# Altium PCB MCB.PcbDoc
Units mm, origin at the board's own origin, x right, y up, seen from the top; angles counter-clockwise.
Board outline 27.45 x 20.12 mm, 2 copper layers (Top Layer, Bottom Layer); 39 components, 48 nets, 197 pads, 48 vias.
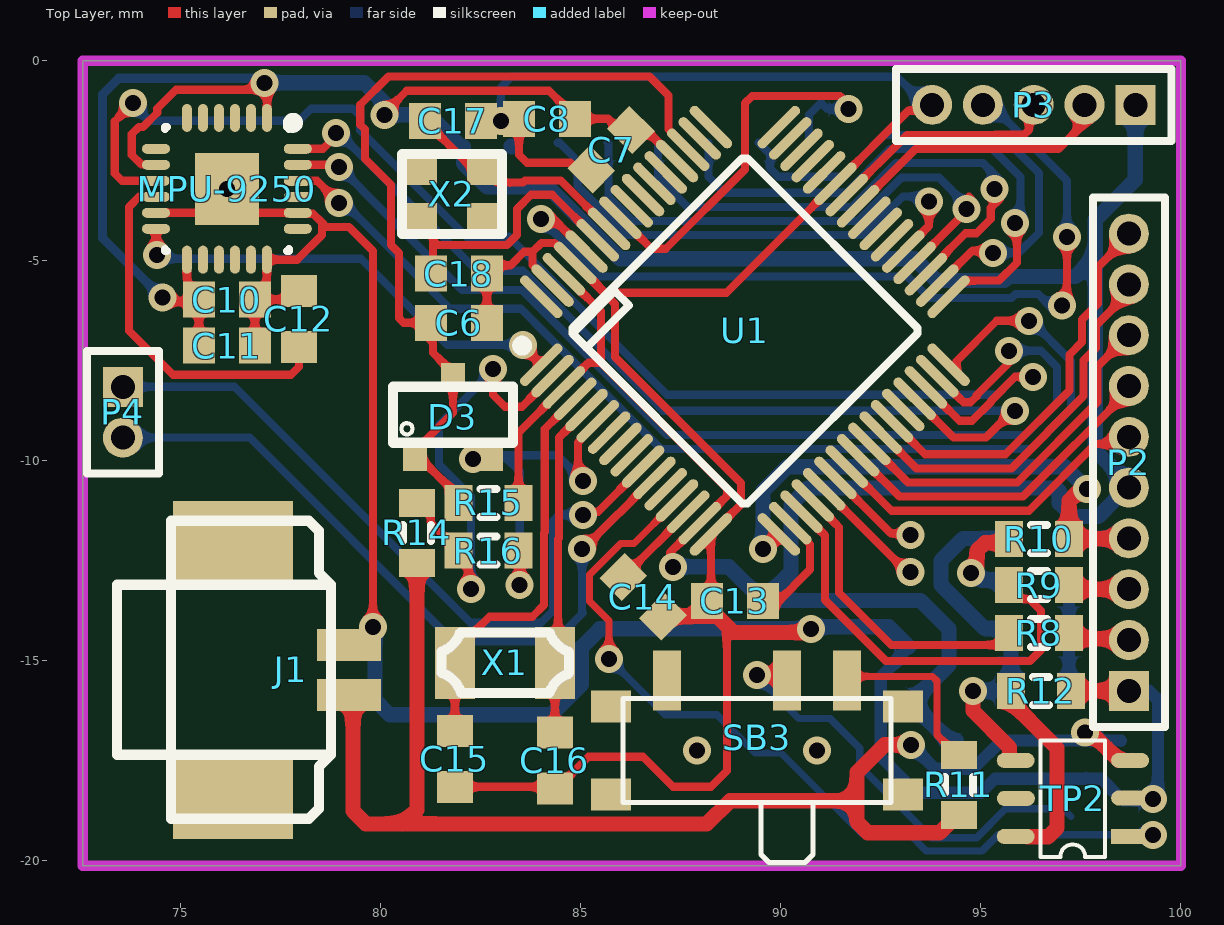
[diagram p0: Top Layer view]
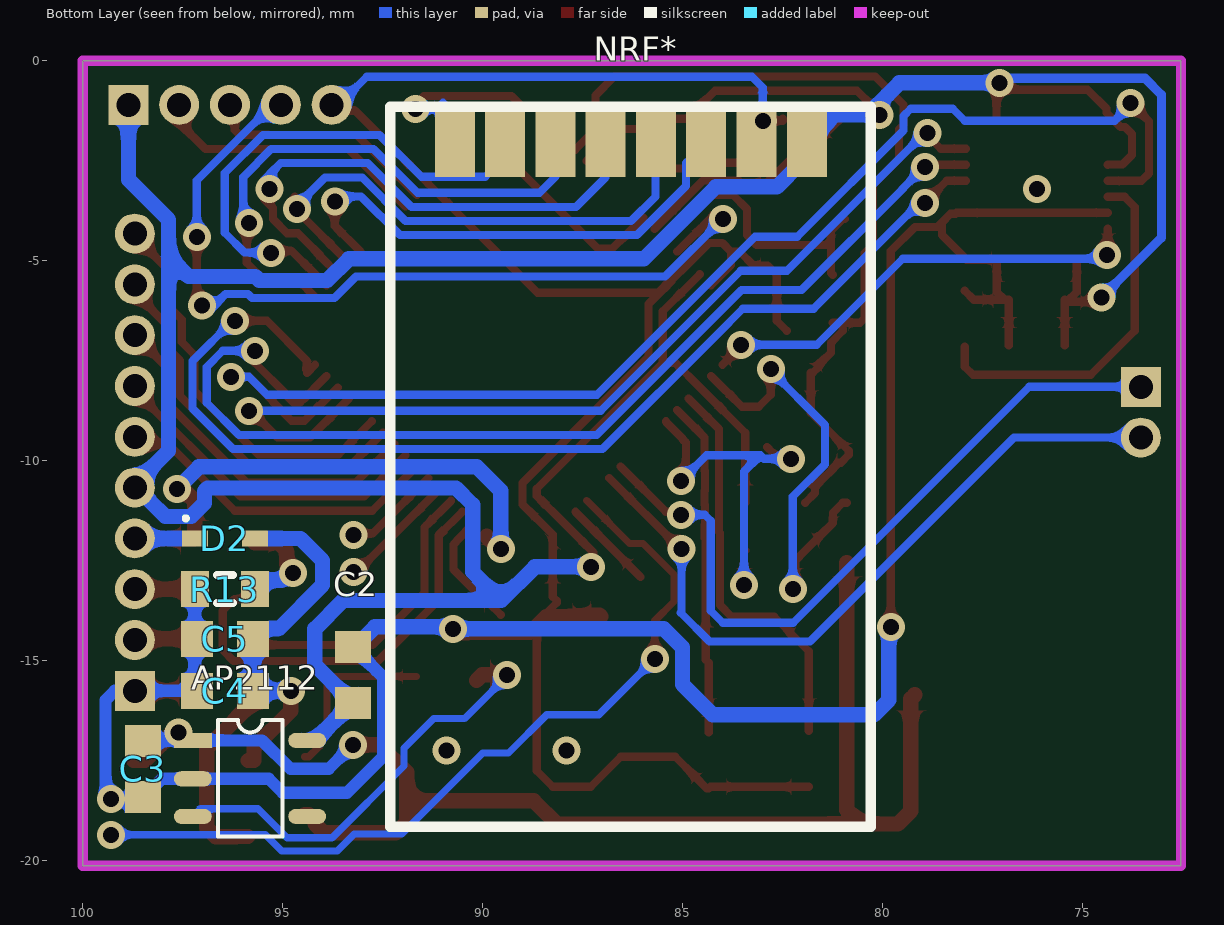
[diagram p1: Bottom Layer view, seen from below]

## Layer stack, top to bottom
Top Solder: solder mask 0.0102, Solder Resist, Dk 3.5
Top Layer: signal copper 0.0356
Dielectric 1: dielectric 0.32, FR-4, Dk 4.8
Bottom Layer: signal copper 0.0356
Bottom Solder: solder mask 0.0102, Solder Resist, Dk 3.5

## Board outline
72.547,-20.122 72.547,0 100,0 100,-20.122

## Design rules (kind name [scope] priority, off if disabled: settings)
Clearance [All] p1: gap=0.15 ignorepadtopadclearanceinfootprint=FALSE
ComponentClearance [All] p1: gap=0.178 collisioncheckmode=3 verticalgap=0 showdistances=FALSE
PolygonConnect [All] p1: connectstyle=Relief reliefconductorwidth=0.254 reliefentries=4 polygonreliefangle="90 Angle" airgapwidth=0.254
RoutingVias [All] p1: holewidth=0.711 width=1.27 viastyle="Through Hole" minholewidth=0.4 minwidth=0.6 maxholewidth=0.711 maxwidth=1.27
SolderMaskExpansion [All] p1: expansion=0.102
Width [All] p1: maxlimit=1.016 minlimit=0.178 preferedwidth=0.508
29 further rules are at their usual default settings.

## Components (designator, comment, footprint, x,y, rotation, side; value= is the part's Value field where it differs from the comment)
AP2112 "AP2112" SOT-23-5 96.62,-16.48 r180 bottom
C2 "Cap Semi" 1608[0603] 93.25,-15.35 r270 bottom value=100pF
C3 "Cap Semi" 1608[0603] 98.5,-17.7 r90 bottom value=100pF
C4 "Cap Semi" 1608[0603] 96.45,-15.75 r180 bottom value=100pF
C5 "Cap Semi" 1608[0603] 96.45,-14.45 r180 bottom value=100pF
C6 "Cap Semi" 1608[0603] 81.95,-6.549 r180 top value=100pF
C7 "Cap Semi" 1608[0603] 85.755,-2.225 r45 top value=100pF
C8 "Cap Semi" 1608[0603] 84.15,-1.45 r0 top value=100pF
C10 "Cap Semi" 1608[0603] 76.15,-5.973 r180 top value=100pF
C11 "Cap Semi" 1608[0603] 76.15,-7.122 r180 top value=100pF
C12 "Cap Semi" 1608[0603] 77.95,-6.45 r270 top value=100pF
C13 "Cap Semi" 1608[0603] 88.85,-13.5 r0 top value=100pF
C14 "Cap Semi" 1608[0603] 86.554,-13.4 r135 top value=100pF
C15 "Cap Semi" 1608[0603] 81.85,-17.45 r270 top value=100pF
C16 "Cap Semi" 1608[0603] 84.35,-17.49 r270 top value=100pF
C17 "Cap Semi" 1608[0603] 81.8,-1.5 r0 top value=100pF
C18 "Cap Semi" 1608[0603] 81.95,-5.323 r0 top value=100pF
D2 "Schottky" SOD-523 96.45,-11.94 r180 bottom
D3 "Vref" SOT-23 81.8,-7.9 r0 top
J1 "Plug2" Terminal_block_2pin_1.25mm_SMD 76.3,-15.2 r90 top
MPU-9250 "24Pin" QFN_24PIN 76.15,-3.2 r270 top
NRF* "NRF24L01" NRF24L01_Module_SMD 80.3,-19.15 r0 bottom
P2 "MHDR1X10" MHDR1X10 98.7,-15.75 r90 top
P3 "MHDR1X5" MHDR1X5 98.86,-1.1 r180 top
P4 "MHDR1X2" MHDR1X2 73.55,-8.15 r270 top
R8 "Res3" J1-0603 96.45,-14.3 r0 top value=1K
R9 "Res3" J1-0603 96.45,-13.11 r0 top value=1K
R10 "Res3" J1-0603 96.45,-11.95 r0 top value=1K
R11 "Res3" J1-0603 94.45,-18.1 r90 top value=1K
R12 "Res3" J1-0603 96.5,-15.75 r180 top value=1K
R13 "Res3" J1-0603 96.45,-13.21 r180 bottom value=1K
R14 "Res3" J1-0603 80.9,-11.8 r270 top value=1K
R15 "Res3" J1-0603 82.689,-11.05 r0 top value=1K
R16 "Res3" J1-0603 82.689,-12.245 r180 top value=1K
SB3 "SPDT" SS-SK-02P 89.35,-17.25 r0 top
TP2 "TP-4057" SOT-23-6 98.1,-19.9 r180 top
U1 "NUC240SE3AE" MCU_LQFP_64_7x7 89.1,-6.75 r45 top
X1 "Xtal" FC-135 82.76,-16.75 r0 top value=32.768k
X2 "Xtal" 2520S 82.6,-3.952 r180 top value=12M

## Footprints (in the part's own frame and the unit in brackets; to place one, negate y for a bottom-side part, rotate by r counter-clockwise, add the part's x,y. Pads: shape width x height; smd on the part's side, far side on the other; paste and mask are expansions set on the pad)
1608[0603] [mm] "Chip Capacitor, Body 1.6x0.8mm, IPC High Density"
  rect 0.8x0.9 smd: 1(-0.7,0) 2(0.7,0)
  body extent -0.87,-0.48 0.87,0.48, height 1.3
2520S [mm]
  rect 0.9x0.8 smd: 1(0,-1.25) 2(1.65,0) ""(0,0) ""(1.65,-1.25)
  silkscreen extent -0.43,-1.63 2.07,0.37
FC-135 [mm]
  rect 1x1.8 smd: 1(-0.91,1.7) 2(1.59,1.7)
  silkscreen extent -1.24,0.94 1.94,2.46
J1-0603 [mm] "Chip Resistor, Body 1.6x0.8mm, IPC High Density"
  rect 0.7x0.9 smd: 1(-0.75,0) 2(0.75,0)
  silkscreen extent -0.2,-0.35 0.2,0.35, body extent -0.85,-0.48 0.85,0.48, height 0.9
MCU_LQFP_64_7x7 [mm]
  oval 1.4x0.25 smd: 1(-4.2,3) 2(-4.2,2.6) 3(-4.2,2.2) 4(-4.2,1.8) 5(-4.2,1.4) 6(-4.2,1) 7(-4.2,0.6) 8(-4.2,0.2) 9(-4.2,-0.2) 10(-4.2,-0.6) 11(-4.2,-1) 12(-4.2,-1.4) 13(-4.2,-1.8) 14(-4.2,-2.2) 15(-4.2,-2.6) 16(-4.2,-3) 33(4.2,-3) 34(4.2,-2.6) 35(4.2,-2.2) 36(4.2,-1.8) 37(4.2,-1.4) 38(4.2,-1) 39(4.2,-0.6) 40(4.2,-0.2) 41(4.2,0.2) 42(4.2,0.6) 43(4.2,1) 44(4.2,1.4) 45(4.2,1.8) 46(4.2,2.2) 47(4.2,2.6) 48(4.2,3)
  oval 0.25x1.4 smd: 17(-3,-4.2) 18(-2.6,-4.2) 19(-2.2,-4.2) 20(-1.8,-4.2) 21(-1.4,-4.2) 22(-1,-4.2) 23(-0.6,-4.2) 24(-0.2,-4.2) 25(0.2,-4.2) 26(0.6,-4.2) 27(1,-4.2) 28(1.4,-4.2) 29(1.8,-4.2) 30(2.2,-4.2) 31(2.6,-4.2) 32(3,-4.2) 49(3,4.2) 50(2.6,4.2) 51(2.2,4.2) 52(1.8,4.2) 53(1.4,4.2) 54(1,4.2) 55(0.6,4.2) 56(0.2,4.2) 57(-0.2,4.2) 58(-0.6,4.2) 59(-1,4.2) 60(-1.4,4.2) 61(-1.8,4.2) 62(-2.2,4.2) 63(-2.6,4.2) 64(-3,4.2)
  silkscreen extent -4.32,-3.1 3.1,3.8, body extent -3.5,-3.5 3.5,3.5, height 1.6
MHDR1X2 [mm] "Connector; Header; 2 Position"
  rect 1x1 hole 0.6: 1(0,0)
  round 1 hole 0.6: 2(1.27,0)
  silkscreen extent -0.9,-0.9 2.17,0.9
MHDR1X5 [mm] "Connector; Header; 5 Position"
  rect 1x1 hole 0.6: 1(0,0)
  round 1 hole 0.6: 2(1.27,0) 3(2.54,0) 4(3.81,0) 5(5.08,0)
  silkscreen extent -0.9,-0.9 5.98,0.9
MHDR1X10 [mm] "Connector; Header; 10 Position"
  rect 1x1 hole 0.6: 1(0,0)
  round 1 hole 0.6: 2(1.27,0) 3(2.54,0) 4(3.81,0) 5(5.08,0) 6(6.35,0) 7(7.62,0) 8(8.89,0) 9(10.16,0) 10(11.43,0)
  silkscreen extent -0.9,-0.9 12.33,0.9
NRF24L01_Module_SMD [mm]
  rect 1x1.7 smd: 1(1.6,-17.1) 2(2.857,-17.1) 3(4.114,-17.1) 4(5.371,-17.1) 5(6.629,-17.1) 6(7.886,-17.1) 7(9.143,-17.1) 8(10.4,-17.1)
  silkscreen extent 0,-18 12.02,0
QFN_24PIN [mm]
  oval 0.7x0.249 smd: 1(-1.772,1) 2(-1.772,0.6) 3(-1.772,0.2) 4(-1.772,-0.2) 5(-1.772,-0.6) 6(-1.772,-1) 13(1.772,-1) 14(1.772,-0.6) 15(1.772,-0.2) 16(1.772,0.2) 17(1.772,0.6) 18(1.772,1)
  oval 0.249x0.7 smd: 7(-1,-1.772) 8(-0.6,-1.772) 9(-0.2,-1.772) 10(0.2,-1.772) 11(0.6,-1.772) 12(1,-1.772) 19(1,1.772) 20(0.6,1.772) 21(0.2,1.772) 22(-0.2,1.772) 23(-0.6,1.772) 24(-1,1.772)
  rect 1.8x1.6 smd: 25(0,0)
  silkscreen extent -1.77,-1.55 1.55,1.78, body extent -1.55,-1.55 1.55,1.55, height 1
SOD-523 [mm] "SODFL, 2-Leads, Body 0.80x1.60mm, IPC Medium Density"
  rect 0.65x0.4 smd: 1(-0.75,0) 2(0.75,0)
  silkscreen extent -1.03,0.45 -0.93,0.55, body extent -0.65,-0.45 0.65,0.45, height 0.65
SOT-23 [mm]
  rect 0.6x0.7 smd: 1(-0.95,-2) 2(0,0) 3(0.95,-2)
  silkscreen extent -1.5,-1.65 1.5,-0.25
SOT-23-5 [mm]
  rect 0.95x0.38 smd: 1(-0.63,-0.51)
  oval 0.95x0.38 smd: 2(-0.63,-1.47) 3(-0.63,-2.41) 4(2.23,-2.41) 5(2.23,-0.51)
  silkscreen extent 0,-2.91 1.61,0
SOT-23-6 [mm]
  rect 0.95x0.38 smd: 1(-0.63,-0.51)
  oval 0.95x0.38 smd: 2(-0.63,-1.47) 3(-0.63,-2.41) 4(2.23,-2.41) 5(2.227,-1.461) 6(2.23,-0.51)
  silkscreen extent 0,-2.91 1.61,0
SS-SK-02P [mm]
  rect 0.7x1.5 smd: 1(-2.195,1.76) 2(0.805,1.76) 3(2.305,1.76)
  rect 1x0.8 smd: ""(-3.595,-1.09) ""(-3.595,1.11) ""(3.705,-1.09) ""(3.705,1.11)
  silkscreen extent -3.29,-2.79 3.41,1.31
Terminal_block_2pin_1.25mm_SMD [mm]
  rect 0.8x1.6 smd: 1(-0.65,-2.9) 2(0.6,-2.9)
  rect 2.1x3 smd: ""(-3.2,0) ""(3.15,0)
  silkscreen extent -3.75,-2.45 3.7,2.9

## Part data
C2 C3 C4 C5 C6 C7 C8 C10 C11 C12 C13 C14 C15 C16 C17 C18: "Capacitor (Semiconductor SIM Model)", LatestRevisionDate=29-May-2009, LatestRevisionNote="IPC-7351 Footprint Added.", PackageDescription="Chip Capacitor", PackageReference=C1206, Published=8-Jun-2000, Publisher="Altium Limited"
D2: library part Diode2
MPU-9250: library part MPU-9250_2
NRF*: library part NRF24L01_module
P2: "Header, 10-Pin", LatestRevisionDate=17-Jul-2002, LatestRevisionNote="Re-released for DXP Platform.", Publisher="Altium Limited"
P3: "Header, 5-Pin", LatestRevisionDate=17-Jul-2002, LatestRevisionNote="Re-released for DXP Platform.", Publisher="Altium Limited"
P4: "Header, 2-Pin", LatestRevisionDate=17-Jul-2002, LatestRevisionNote="Re-released for DXP Platform.", Publisher="Altium Limited"
R8 R9 R10 R11 R12 R13 R14 R15 R16: "Resistor", LatestRevisionDate=29-May-2009, LatestRevisionNote="IPC-7351 Footprint Added.", PackageDescription="Chip Resistor", PackageReference=J1-0603, Published=8-Jun-2000, Publisher="Altium Limited"
SB3: library part Switch_Button2
U1: OriginalSymbolOrigin=(0,0)

## Via types
v1: diameter 0.7, hole 0.4, Top Layer to Bottom Layer, 47 vias
v2: diameter 0.7, hole 0.4, Top Layer to Bottom Layer, tented top, 1 vias

## Nets (pads, with @x,y where several pads share a name; then routed paths per layer and width w, separated by ;. In a path a pad name is that pad's centre, name@x,y a point inside that pad or via, vN(x,y) a via of type N, cw(c..) or ccw(c..) an arc to the next point about the centre after c; other vN are vias at no path point)
ADC_ONOFF: D3.3 R16.1 U1.6 | length 9.8
  Top Layer w0.203: v1(82.3,-9.95) 82.6,-9.95 82.75,-9.8 D3.3@82.899,-9.651 ; R16.1 83.471,-12.277 v1(83.471,-13.1) ; v1(85.05,-10.5) 85.05,-10.393 84.923,-10.265 84.923,-9.546 84.993,-9.476 84.993,-9.455 85.423,-9.025 U1.6
  Bottom Layer w0.203: v1(82.3,-9.95) 82.973,-9.95 83.061,-9.861 ; v1(83.471,-13.1) 83.471,-10.271 83.061,-9.861 ; v1(85.05,-10.5) 84.411,-9.861 83.061,-9.861
AVDD: AP2112.5 C2.2 C7.2 C8.2 C10.2 C11.2 MPU-9250.1 MPU-9250.8 MPU-9250.13 NRF*.1 P2.5 P3.1 R15.2 U1.3 U1.15 U1.52 U1.62 | length 98.7
  Top Layer w0.203: MPU-9250.8 74.369,-2.591 74.011,-2.591 73.771,-2.351 73.771,-1.83 73.949,-1.652 74.057,-1.652 74.409,-1.299 74.409,-1.192 74.878,-0.723 77.2,-0.723 77.159,-0.764 77.159,-1.419 MPU-9250.1 ; v1@74.65,-6.023 C10.2@75.392,-6.023 ; MPU-9250.13 75.15,-5.78 C10.2@75.392,-6.023 ; C11.2 C10.2@75.45,-6.08 ; C10.2 C10.2@75.45,-6.08 ; v1@80.2,-1.449 80.2,-1.194 80.646,-0.748 84.198,-0.748 84.85,-1.4 C8.2 85.677,-1.45 85.932,-1.705 86.601,-1.705 U1.52 ; R15.2 83.439,-9.3 U1.3 85.189,-7.55 85.5,-7.55 ; U1.62 85.5,-6.261 85.5,-7.55 ; v1(87.3,-12.65) 87.231,-12.581 87.231,-12.296 U1.15 88.65,-10.877 88.65,-10.7 85.5,-7.55 ; C10.2@75.392,-6.023 C10.2@75.45,-6.08
  Bottom Layer w0.229: v1(74.536,-5.923) 73.036,-4.423 73.036,-0.846 73.446,-0.436 76.971,-0.436 v1(77.086,-0.55)
  Bottom Layer w0.381: v1(77.086,-0.55) 79.586,-0.55 80.136,-1.1 80.086,-1.15 v1(80.086,-1.349) 81.199,-1.349 NRF*.1 ; NRF*.1@82.014,-2.15 82.064,-2.15 82.064,-2.564 82.65,-3.15 84.176,-3.15 85.976,-4.95 93.35,-4.95 93.89,-5.49 95.586,-5.49 95.686,-5.39 97.36,-5.39 97.859,-4.891 ; v1(87.3,-12.65) 88.7,-12.65 89.541,-13.491 ; C2.2 C2.2@93.3,-16.05 ; AP2112.5 94.106,-16.99 94.106,-16.906 93.509,-16.31 93.509,-16.26 C2.2@93.3,-16.05 ; P3.1 98.86,-2.971 97.859,-3.972 97.859,-4.891 ; 89.541,-13.491 90.252,-12.78 90.252,-11.098 90.669,-10.681 96.88,-10.681 96.959,-10.76 96.959,-11.059 97.29,-11.39 97.936,-11.39 98.34,-10.986 98.34,-10.973 98.644,-10.67 P2.5 98.7,-10.589 97.859,-9.748 97.859,-4.891 ; 89.541,-13.491 93.49,-13.491 94.2,-14.201 94.2,-15.1 93.509,-15.79 93.509,-15.84 C2.2@93.3,-16.05
BAT_ADC: R14.1 R16.2 U1.2 | length 11.8
  Top Layer w0.203: R14.1 81,-11.05 81.248,-11.298 81.248,-11.554 R16.2 82.187,-12.493 82.187,-13.147 v1(82.25,-13.21) ; v1(82.8,-7.7) 82.8,-8.35 83.1,-8.65 83.523,-8.65 U1.2
  Bottom Layer w0.203: v1(82.25,-13.21) 82.25,-10.891 81.448,-10.09 81.448,-9.102 82.85,-7.7 v1(82.8,-7.7)
button: P2.10 U1.27 | length 10
  Top Layer w0.203: U1.27 93.6,-9.836 95.615,-9.836 97.212,-8.238 97.212,-7.349 97.527,-7.034 97.527,-6.471 97.929,-6.068 97.929,-5.157 98.7,-4.387 P2.10
CHRG: TP2.1 U1.13 | length 21
  Top Layer w0.178: v1(85.7,-14.95) 85.7,-14 85.22,-13.52 85.22,-12.841 85.996,-12.065 86.331,-12.065 U1.13
  Bottom Layer w0.178: v1(85.7,-14.95) 87.1,-16.35 88.4,-16.35 89.359,-17.309 90,-17.309 92.025,-19.334 93.213,-19.334 93.63,-19.751 95.032,-19.751 95.432,-19.35 v1(99.3,-19.35)
D12I: C18.1 U1.59 X2.2 | length 7.1
  Top Layer w0.203: X2.2 81,-3.952 81.298,-4.25 81.298,-4.484 ; C18.1@81.25,-5.35 81.298,-5.302 81.298,-4.484 ; U1.59 84.284,-3.348 83.751,-3.348 83.398,-3.701 83.398,-4.359 83.154,-4.603 81.417,-4.603 81.298,-4.484
D12O: C17.1 U1.58 X2.1 | length 6.1
  Top Layer w0.203: C17.1 82.252,-2.652 82.252,-2.403 82.895,-3.047 83.553,-3.047 83.604,-2.995 84.497,-2.995 U1.58
D+: R8.1 U1.20 | length 7.5
  Top Layer w0.203: U1.20 90.797,-11.005 91.453,-11.661 91.453,-13.299 92.758,-14.603 95.397,-14.603 R8.1
D-: R9.1 U1.19 | length 10.7
  Top Layer w0.203: U1.19 91.1,-11.861 91.1,-13.479 92.622,-15.002 96.229,-15.002 96.5,-14.731 96.5,-13.75 96.208,-13.458 95.948,-13.458 95.7,-13.21 R9.1
DVBUS: D2.1 P2.4 R10.2 U1.17 | length 15.1
  Top Layer w0.381: v1(89.55,-12.2) 89.684,-12.2 89.692,-12.208 89.692,-12.098 U1.17@89.902,-11.887 ; v1(97.65,-10.7) 97.5,-10.7 97.2,-11 R10.2 98.69,-11.95 P2.4
  Bottom Layer w0.381: v1(89.55,-12.2) 89.55,-10.75 90.15,-10.15 97.1,-10.15 v1(97.65,-10.7) ; D2.1 P2.4
GND: AP2112.2 C2.1 C3.1 C4.1 C5.1 C6.1 C7.1 C8.1 C10.1 C11.1 C12.1 C13.1 C14.1 C15.2 C16.2 C17.2 C18.2 J1.2 MPU-9250.11 MPU-9250.18 MPU-9250.20 NRF*.2 P2.1 P3.5 R12.1 R13.1 TP2.2 U1.16 U1.43 U1.61 U1.63 | length 115.6
  Top Layer w0.203: MPU-9250.11 MPU-9250.20 78.16,-3.8 78.184,-3.824 78.304,-3.824 78.524,-4.044 ; C11.1 C10.1 C10.1@76.958,-5.973 ; C12.1 77.727,-5.973 C10.1@76.958,-5.973 ; v1(79.8,-14.15) 79.8,-4.753 79.199,-4.152 78.631,-4.152 78.524,-4.044 ; C15.2 84.311,-18.15 C16.2 84.4,-18.19 84.698,-17.891 85.189,-17.4 86.55,-17.4 87.3,-18.15 88.25,-18.15 88.65,-17.75 88.65,-14.131 ; C6.1@82.4,-6.75 82.65,-6.5 C18.2@82.65,-5.35 ; C17.2@82.5,-1.45 C17.2 83.4,-1.5 C8.1 83.45,-2.35 83.65,-2.55 84.738,-2.55 84.883,-2.695 C7.1@85.305,-2.695 ; C18.2 C18.2@82.65,-5.35 ; U1.63 84.292,-5.606 83.791,-5.106 83.791,-4.773 ; 88.5,-13.981 88.5,-13.9 88.15,-13.55 C13.1 88.251,-13.399 U1.16 89.003,-11.089 89.003,-10.554 85.853,-7.404 85.853,-6.082 85.287,-5.516 85.287,-5.496 84.857,-5.066 U1.61 ; P3.5 93.636,-1.244 93.192,-1.244 U1.43 88.636,-5.8 85.617,-5.8 84.87,-5.053 U1.61 ; C10.1@76.958,-5.973 77.15,-5.78 MPU-9250.18 77.907,-4.973 78.524,-4.356 78.524,-4.044 ; C18.2@82.65,-5.35 82.886,-5.114 83.236,-5.114 83.577,-4.773 83.791,-4.773 ; 83.791,-4.773 84.012,-4.553 84.344,-4.553 84.845,-5.053 U1.61
  Top Layer w0.381: C14.1 87.085,-13.86 87.381,-13.86 87.416,-13.895 88.414,-13.895 88.5,-13.981 88.65,-14.131 88.811,-14.292 90.584,-14.292 v1@90.713,-14.163 ; R12.1 P2.1
  Top Layer w0.508: v1@90.713,-14.163 v1(90.75,-14.2)
  Bottom Layer w0.203: v1(83,-1.5) 83,-0.671 83.271,-0.4 92.9,-0.4 93.6,-1.1 P3.5
  Bottom Layer w0.305: C2.1@93.2,-14.65 92.952,-14.898 92.952,-14.948 92.498,-15.402 92.498,-17.4 93.397,-18.3 94.999,-18.3 95.349,-17.95 AP2112.2 98.017,-17.95 98.241,-18.173 98.241,-18.19 98.45,-18.4 C3.1 ; R13.1 97.2,-15.4 97.55,-15.75 P2.1 99.2,-15.75 99.429,-15.979 99.429,-18.322 v1(99.3,-18.45) 99.258,-18.492 C3.1@98.558,-18.492
  Bottom Layer w0.381: v1(79.8,-14.15) 79.85,-14.2 79.85,-15.979 80.221,-16.35 84.25,-16.35 85.009,-15.591 85.009,-14.664 85.473,-14.2 v1(90.75,-14.2) 90.8,-14.15 92.7,-14.15 C2.1@93.2,-14.65 ; NRF*.2@83.25,-2.129 NRF*.2@83.271,-2.15
ICE_CLK: P3.3 U1.42 | length 5.9
  Top Layer w0.203: U1.42 93.15,-1.852 95.361,-1.852 95.363,-1.85 96.081,-1.85 96.2,-1.731 96.2,-1.22 P3.3
ICE_DAT: P3.2 U1.41 | length 7
  Top Layer w0.203: U1.41 93.362,-2.205 96.937,-2.205 97.59,-1.552 P3.2
LED1: P2.6 U1.23 | length 8.3
  Top Layer w0.203: U1.23 91.658,-10.144 92.763,-11.248 96.2,-11.248 97.864,-9.584 98.516,-9.584 P2.6
LED2: P2.7 U1.24 | length 8.4
  Top Layer w0.203: U1.24 92.962,-10.895 96.054,-10.895 98.7,-8.249 P2.7
LED3: P2.8 U1.25 | length 8.9
  Top Layer w0.203: U1.25 93.175,-10.542 95.908,-10.542 97.919,-8.531 97.919,-7.641 P2.8
LED4: P2.9 U1.26 | length 9.5
  Top Layer w0.203: U1.26 93.387,-10.189 95.761,-10.189 97.566,-8.384 97.566,-7.495 97.88,-7.18 97.88,-6.617 98.7,-5.797 P2.9
MPU_INT: MPU-9250.12 U1.1 | length 11.9
  Top Layer w0.203: MPU-9250.12 74.378,-4.688 74.25,-4.815 74.285,-4.85 v1(74.4,-4.85) ; v1(83.55,-7.1) 83.55,-7.14 U1.1
  Bottom Layer w0.203: v1(74.4,-4.85) 74.377,-4.85 74.277,-4.95 79.5,-4.95 81.65,-7.1 82.549,-7.1 82.551,-7.098 83.548,-7.098 v1(83.55,-7.1) v1@83.5,-7.05
NetAP2112_3: AP2112.3 SB3.2 | length 11
  Top Layer w0.381: v1(89.4,-15.35) 90.015,-15.35 SB3.2
  Bottom Layer w0.178: v1(89.4,-15.35) 89.4,-15.393 90.454,-16.447 91.233,-16.447 91.972,-17.186 91.972,-17.629 93.766,-19.423 94.896,-19.423 95.619,-18.7 97.06,-18.7 AP2112.3
NetC12_2: C12.2 MPU-9250.10 | length 9.2
  Top Layer w0.203: MPU-9250.10 73.953,-3.4 73.7,-3.653 73.7,-6.75 74.8,-7.85 77.749,-7.85 77.95,-7.649 C12.2
NetC13_2: C13.2 U1.18 | length 3
  Top Layer w0.203: C13.2@89.55,-13.85 89.848,-13.552 89.898,-13.552 90.732,-12.718 90.732,-12.092 90.661,-12.021 90.661,-12.001 90.231,-11.571 U1.18
NetC14_2: C14.2 U1.14 | length 2.3
  Top Layer w0.203: C14.2 86.059,-12.902 U1.14
NetP2_2: P2.2 R8.2 | length 1.5
  Top Layer w0.381: R8.2@97.2,-14.45 98.67,-14.45 P2.2
NetP2_3: P2.3 R9.2 | length 1.5
  Top Layer w0.381: R9.2@97.2,-13.21 P2.3
NetR11_2: R11.2 SB3.3 | length 4.5
  Top Layer w0.178: SB3.3@91.655,-15.39 93.79,-15.39 93.898,-15.498 93.898,-16.848 94.089,-17.039 94.089,-17.139 94.35,-17.4 R11.2@94.45,-17.4
NetR12_2: R12.2 TP2.6 | length 5
  Top Layer w0.381: R12.2 95.75,-16.033 96.9,-17.183 96.9,-19.177 96.677,-19.4 96.164,-19.4 96.154,-19.39 TP2.6
NRF_CE: NRF*.3 U1.37 | length 12.9
  Top Layer w0.203: U1.37 93.7,-4.13 93.7,-3.816 93.908,-3.607 v1@93.908,-3.5
  Bottom Layer w0.203: NRF*.3 84.464,-2.05 84.813,-2.398 84.813,-2.448 84.92,-2.556 84.92,-3.134 86.146,-4.36 92.074,-4.36 93.045,-3.389 93.783,-3.389 93.794,-3.4 93.7,-3.494 v1(93.7,-3.522)
NRF_IRQ: NRF*.8 U1.57 | length 10.8
  Top Layer w0.203: U1.57 86.767,-4.7 87.12,-4.7 89.1,-2.72 89.1,-1.06 89.284,-0.876 91.476,-0.876 91.8,-1.2 v1@91.8,-1.3
  Bottom Layer w0.203: NRF*.8 90.7,-1.348 90.998,-1.05 91.148,-1.2 v1(91.686,-1.2)
RESET: P3.4 U1.60 | length 21.6
  Top Layer w0.203: v1(84,-3.95) 84.307,-3.95 85.128,-4.77 U1.60 ; v1(97.024,-6.122) 97.028,-6.122 97.15,-6 v1(97.15,-4.4)
  Bottom Layer w0.203: v1(84,-3.95) 84,-3.952 85.44,-5.392 93.167,-5.392 93.707,-5.933 95.769,-5.933 95.869,-5.833 96.433,-5.833 96.722,-6.122 v1(97.024,-6.122) ; P3.4 95.257,-1.1 97.15,-2.993 v1(97.15,-4.4)
SPI0_CLK: MPU-9250.23 U1.31 | length 27.2
  Top Layer w0.203: MPU-9250.23 78.898,-2.6 v1(78.95,-2.652) ; U1.31 94.563,-8.537 94.744,-8.537 94.895,-8.385 94.895,-8.354 95.7,-7.55 v1(95.7,-7.25)
  Bottom Layer w0.203: v1(78.95,-2.652) 78.96,-2.652 79.502,-3.194 79.502,-3.204 82.027,-5.73 83.53,-5.73 87.152,-9.352 96.099,-9.352 96.901,-8.549 96.901,-7.651 96.501,-7.25 v1(95.7,-7.25)
SPI0_CSN: MPU-9250.22 U1.32 | length 28
  Top Layer w0.203: MPU-9250.22 78.4,-3 v1(78.95,-3.55) ; U1.32 94.396,-7.803 94.396,-7.501 95.396,-6.5 v1(96.2,-6.5)
  Bottom Layer w0.203: v1(78.95,-3.55) 79.077,-3.55 81.727,-6.2 83.501,-6.2 84.152,-6.851 87.006,-9.705 96.245,-9.705 97.255,-8.695 97.255,-7.504 96.25,-6.5 v1(96.2,-6.5)
SPI0_MISO: MPU-9250.9 U1.30 | length 32.8
  Top Layer w0.203: v1(73.807,-1.05) 73.347,-1.511 73.347,-2.817 73.53,-3 MPU-9250.9 ; U1.30 94.461,-9 94.78,-9 95.248,-8.532 95.248,-8.501 95.849,-7.9 v1(96.3,-7.9)
  Bottom Layer w0.203: v1(73.807,-1.05) 73.807,-1.106 74.202,-1.5 77.95,-1.5 78.252,-1.198 79.302,-1.198 79.484,-1.381 79.484,-1.745 82.137,-4.398 83.198,-4.398 87.149,-8.35 95.399,-8.35 95.849,-7.9 v1(96.3,-7.9)
SPI0_MOSI: MPU-9250.24 U1.29 | length 24.3
  Top Layer w0.203: MPU-9250.24 78.551,-2.2 78.883,-1.869 v1@78.883,-1.806 ; v1(78.883,-1.802) v1@78.883,-1.806 ; v1@78.95,-1.873 v1@78.883,-1.806 ; U1.29 94.316,-9.42 95.13,-9.42 95.8,-8.75 v1(95.85,-8.75)
  Bottom Layer w0.203: v1@78.877,-1.8 78.879,-1.802 v1(78.883,-1.802) 78.951,-1.802 82.399,-5.25 83.55,-5.25 87.05,-8.75 v1(95.85,-8.75)
SPI1_CLK: NRF*.5 U1.35 | length 13.7
  Top Layer w0.203: U1.35 93.625,-5.323 94.055,-4.893 94.055,-4.873 94.616,-4.312 94.893,-4.312 95.246,-3.96 95.246,-3.683 95.474,-3.454 95.474,-3.226 95.45,-3.25 v1@95.45,-3.3
  Bottom Layer w0.203: NRF*.5 86.929,-2.916 87.666,-3.653 91.782,-3.653 92.877,-2.558 95.051,-2.558 95.436,-2.943 95.336,-3.043 v1(95.336,-3.2)
SPI1_CSN: NRF*.4 U1.36 | length 13.7
  Top Layer w0.203: U1.36 94.764,-3.632 94.764,-3.464 v1@94.7,-3.4
  Bottom Layer w0.203: NRF*.4 85.686,-2.064 85.686,-3.4 86.292,-4.006 91.928,-4.006 93.014,-2.921 93.949,-2.921 94.644,-3.616 v1(94.644,-3.711)
SPI1_MISO: NRF*.7 U1.34 | length 13
  Top Layer w0.203: U1.34 94.775,-4.752 95.219,-4.752 95.198,-4.731 v1@95.198,-4.7
  Bottom Layer w0.203: NRF*.7 89.725,-2.332 89.725,-2.686 89.939,-2.9 91.536,-2.9 92.584,-1.852 95.495,-1.852 96.451,-2.808 96.451,-4.299 95.955,-4.796 95.304,-4.796 v1(95.3,-4.8)
SPI1_MOSI: NRF*.6 U1.33 | length 13.8
  Top Layer w0.203: U1.33 94.598,-5.495 95.456,-5.495 95.901,-5.049 95.901,-4.152 v1@95.9,-4.15
  Bottom Layer w0.203: NRF*.6 88.186,-2.9 88.586,-3.3 91.635,-3.3 92.73,-2.205 95.29,-2.205 95.987,-2.902 95.987,-3.799 95.786,-4 95.835,-4.05 v1(95.85,-4.05)
STDBY: TP2.5
UART_0_RX: U1.21 | length 3
  Top Layer w0.203: U1.21 93.15,-12.78 v1(93.237,-12.78)
UART_0_TX: U1.22 | length 2.5
  Top Layer w0.203: U1.22 92.752,-11.816 93.203,-11.816 v1(93.237,-11.85)
UART_1_RX: P4.1 U1.10 | length 18.4
  Top Layer w0.203: v1(85.05,-11.35) 85.126,-11.274 85.424,-11.274 U1.10
  Bottom Layer w0.203: P4.1 76.339,-8.15 82.239,-14.05 84,-14.05 84.3,-13.75 84.3,-11.5 84.45,-11.35 v1(85.05,-11.35)
UART_1_TX: P4.2 U1.11 | length 18.1
  Top Layer w0.203: v1(85.028,-12.2) 85.048,-12.2 85.056,-12.208 U1.11
  Bottom Layer w0.203: P4.2 76.72,-9.42 81.816,-14.516 84.334,-14.516 85.05,-13.8 85.028,-13.778 v1(85.028,-12.2)
USB_INT: R10.1 R13.2 | length 2.8
  Top Layer w0.381: v1(94.75,-12.8) 94.75,-12.741 94.905,-12.585 94.905,-12.245 95.1,-12.05 95.7,-12.05 R10.1
  Bottom Layer w0.381: v1(94.75,-12.8) 94.809,-12.8 94.99,-12.981 95.54,-12.981 95.7,-13.141 R13.2
V_BAT: AP2112.1 C3.2 J1.1 R11.1 R14.2 TP2.3 | length 35.6
  Top Layer w0.381: J1.1 79.3,-15.95 79.3,-18.757 79.623,-19.081 80.55,-19.081 ; R14.2 80.9,-18.73 80.55,-19.081 ; v1(93.25,-17.1) 92.589,-17.1 91.9,-17.789 91.9,-18.5 ; R11.1 94.35,-18.85 94.19,-19.009 94.19,-19.077 93.967,-19.3 92.173,-19.3 91.9,-19.027 91.9,-18.5 ; v1(97.608,-16.792) 97.748,-16.792 98.446,-17.49 TP2.3 ; 80.55,-19.081 88.145,-19.081 88.725,-18.5 91.9,-18.5
  Bottom Layer w0.305: v1(93.25,-17.1) 93.85,-17.7 94.808,-17.7 95.518,-16.99 AP2112.1 98.49,-16.99 C3.2
V_USB: C4.2 C5.2 D2.2 TP2.4 | length 9.5
  Top Layer w0.381: v1(94.8,-15.75) 94.8,-16.25 95.717,-17.167 TP2.4@95.717,-17.49 ; TP2.4@95.717,-17.49 TP2.4
  Bottom Layer w0.381: v1(94.8,-15.75) 95.8,-15.75 95.75,-15.7 C5.2 95.75,-14.4 95.54,-14.19 95.088,-14.19 94.006,-13.108 94.006,-12.492 94.557,-11.94 D2.2
Vref: C6.2 D3.1 D3.2 R15.1 U1.51 | length 21.9
  Top Layer w0.203: C6.2@81,-6.7 81,-6.75 81.298,-7.048 81.298,-7.298 81.602,-7.602 81.602,-7.652 81.75,-7.8 81.8,-7.8 D3.2 81.8,-8.8 80.85,-9.75 80.85,-9.85 81.048,-10.048 81.098,-10.048 81.69,-10.64 81.69,-10.802 R15.1 ; C6.2 80.569,-6.549 80.45,-6.43 80.45,-4.805 80.248,-4.603 80.248,-3.1 79.598,-2.45 79.598,-1.713 79.484,-1.598 79.484,-1.1 80.189,-0.395 86.713,-0.395 87.185,-0.867 87.185,-1.712 87.686,-2.212 U1.51
X32I: C16.1 U1.5 X1.2 | length 8.4
  Top Layer w0.203: C16.1 X1.2 84.426,-14.974 84.426,-11.951 84.45,-11.927 84.45,-11.601 84.448,-11.599 84.448,-11.101 84.453,-11.096 84.453,-10.754 84.448,-10.749 84.448,-10.251 84.453,-10.246 84.453,-9.417 U1.5
X32O: C15.1 U1.4 X1.1 | length 10.2
  Top Layer w0.203: C15.1 X1.1 81.85,-14.763 82.714,-13.898 83.783,-13.898 84.073,-13.608 84.073,-11.805 84.097,-11.781 84.097,-11.747 84.095,-11.745 84.095,-10.955 84.097,-10.953 84.097,-10.897 84.095,-10.895 84.095,-10.105 84.097,-10.103 84.097,-9.208 U1.4
pads on no net: AP2112.4 J1. MPU-9250.2 MPU-9250.3 MPU-9250.4 MPU-9250.5 MPU-9250.6 MPU-9250.7 MPU-9250.14 MPU-9250.15 MPU-9250.16 MPU-9250.17 MPU-9250.19 MPU-9250.21 MPU-9250.25 SB3. SB3.1 U1.7 U1.8 U1.9 U1.12 U1.28 U1.38 U1.39 U1.40 U1.44 U1.45 U1.46 U1.47 U1.48 U1.49 U1.50 U1.53 U1.54 U1.55 U1.56 U1.64 X2.
copper on no net:
  other v1: 87.905,-17.24 90.905,-17.24
  other v2: 76.15,-3.2

## Keep-outs
Keep-Out Layer:
  the board outline again, w0.254